# EAGLE board stepper-v1.1-pan (EAGLE 6.5.0)
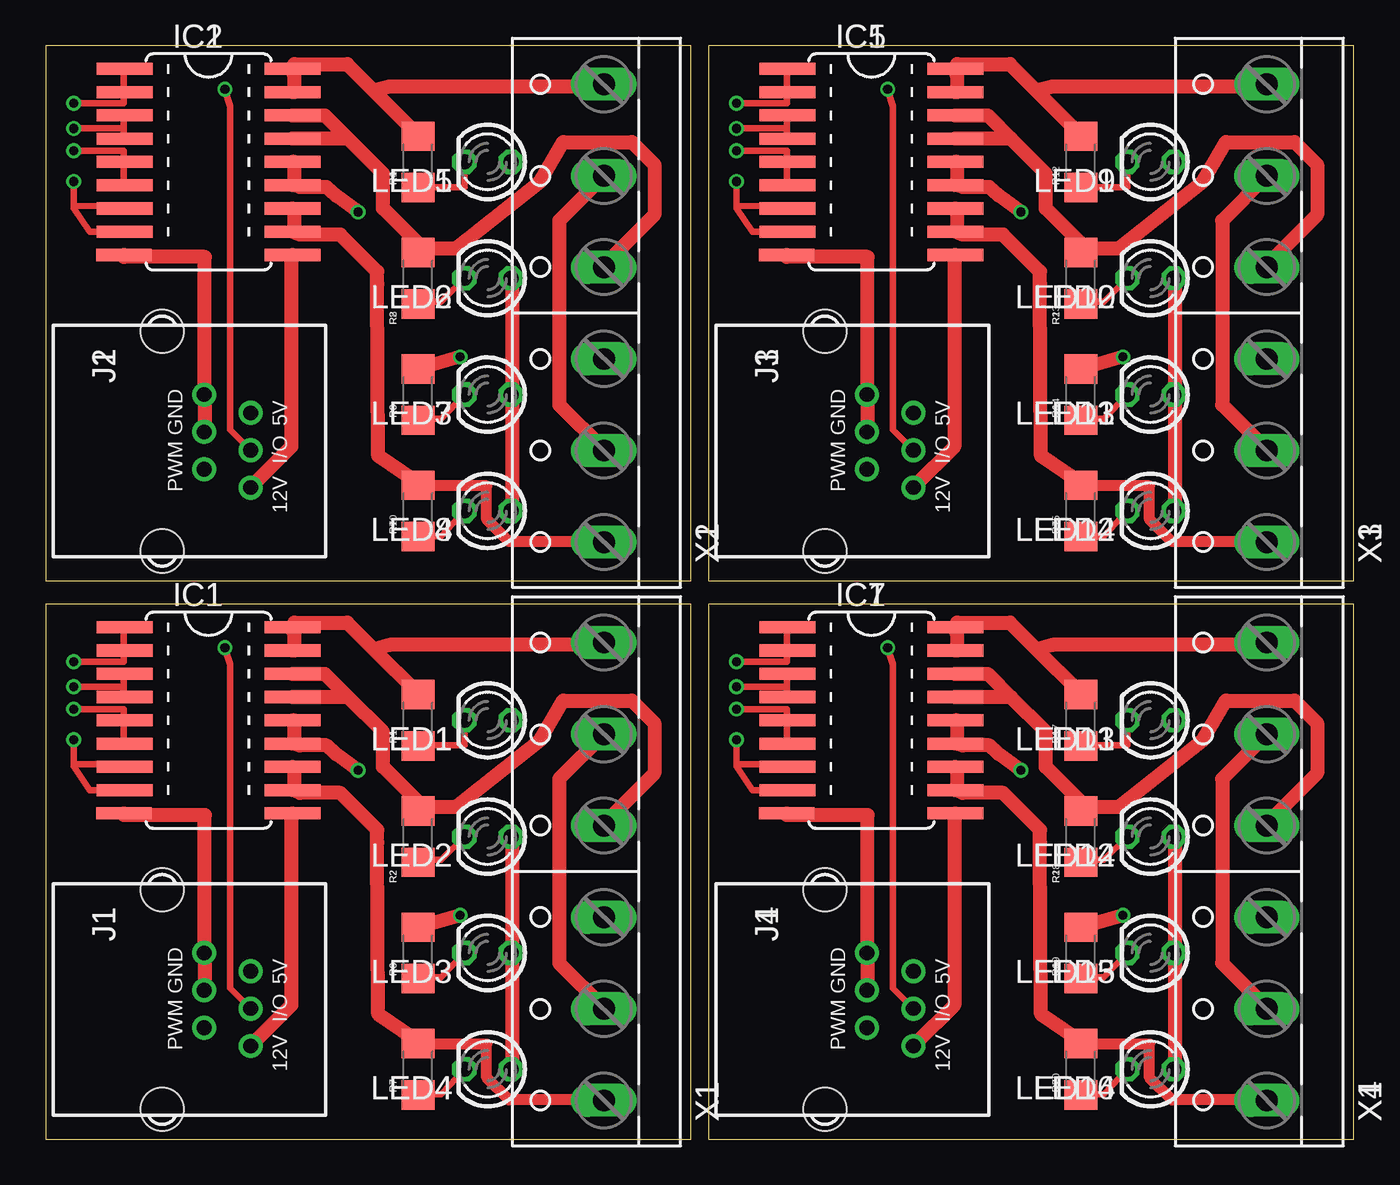
[diagram p0: board, top side]
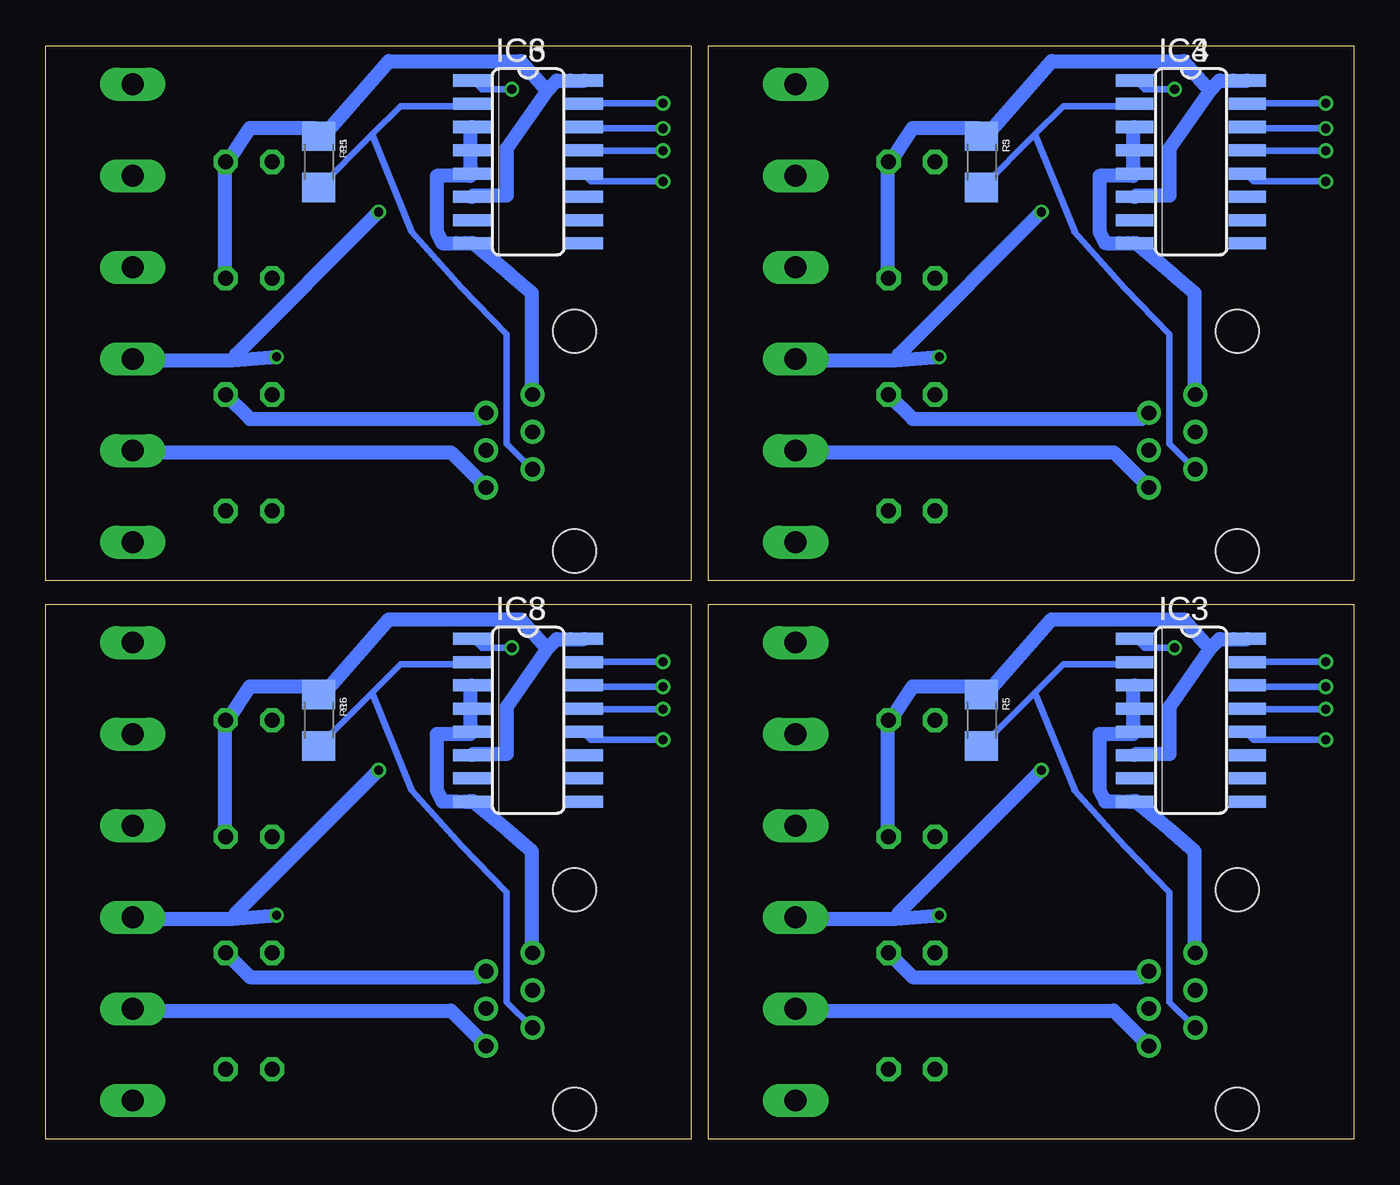
[diagram p1: board, bottom side, seen from below]

Size 71.42 x 59.68 mm. Coordinates in mm from the lower left corner, seen from the top.
Outline: 0,0 35.23,0 35.23,29.2 0,29.2 0,0
Outline: 0,30.48 35.23,30.48 35.23,59.68 0,59.68 0,30.48
Outline: 36.2,30.48 71.42,30.48 71.42,59.68 36.2,59.68 36.2,30.48
Outline: 36.2,0 71.42,0 71.42,29.2 36.2,29.2 36.2,0
Copper layers (1*16): Top 0.035mm / dielectric 1.5mm / Bottom 0.035mm
Design rules "Fusion_eagle_rule_v1.1": minimum track width 6mil, minimum drill 12mil, track to track 6mil, track to pad 6mil, pad to pad 6mil, via to via 6mil, smd to smd 0mil, copper to edge 10mil, drill to drill 10mil, minimum pad ring 10mil, minimum via ring 6mil, stop-mask expansion 2mil, vias tented up to drill 100mil, thermal gap 10mil
Net classes: 0 default: width 0.356 mm; 1 power: width 0.61 mm
vRestrict: area 1.9,15.2 to 8.3,29.2; area 9.5,15.2 to 15.9,29.2; area 1.9,45.7 to 8.3,59.7; area 9.5,45.7 to 15.9,59.7; area 38.1,45.7 to 44.5,59.7; area 45.7,45.7 to 52.1,59.7; area 38.1,15.2 to 44.5,29.2; area 45.7,15.2 to 52.1,29.2

## Footprints (pad centres in the part's own frame; a part is rotated, then mirrored left to right if it is on the bottom)
SO18W = smd 0.66 x 3.048: 1 -5.08,-4.585; 2 -3.81,-4.585; 3 -2.54,-4.585; 4 -1.27,-4.585; 5 0,-4.585; 6 1.27,-4.585; 7 2.54,-4.585; 8 3.81,-4.585; 9 5.08,-4.623; 10 5.08,4.585; 11 3.81,4.585; 12 2.54,4.585; 13 1.27,4.585; 14 0,4.585; 15 -1.27,4.585; 16 -2.54,4.585; 17 -3.81,4.585; 18 -5.08,4.585
SO16 = smd 0.66 x 2.032: 1 -4.445,-3.073; 2 -3.175,-3.073; 3 -1.905,-3.073; 4 -0.635,-3.073; 5 0.635,-3.073; 6 1.905,-3.073; 7 3.175,-3.073; 8 4.445,-3.073; 9 4.445,3.073; 10 3.175,3.073; 11 1.905,3.073; 12 0.635,3.073; 13 -0.635,3.073; 14 -1.905,3.073; 15 -3.175,3.073; 16 -4.445,3.073
RJ12-RIGHTANGLE = drill 0.8 pad 1.3: +5V -1.54,4.84; +12V 2.54,4.84; GND1 -2.54,2.3; GND2 -0.5,2.3; I/O 0.5,4.84; PWM 1.54,2.3 | hole 2.36: -6,0; 6,0
LED3MM = drill 0.813 octagon: A -1.27,0; K 1.27,0
1206 = smd 1.6 x 1.8: 1 -1.4,0; 2 1.4,0
W237-6 = drill 1.194 long: 1 -12.5,-1.27; 2 -7.5,-1.27; 3 -2.5,-1.27; 4 2.5,-1.27; 5 7.5,-1.27; 6 12.5,-1.27

## Placement (x,y rotation side)
IC1  ULN2803  [SO18W]  8.89,22.86 270 top
IC2  ULN2803  [SO18W]  8.89,53.34 270 top
IC3  CD74HC238M  [SO16]  8.89,22.86 270 bottom
IC4  CD74HC238M  [SO16]  8.89,53.34 270 bottom
IC5  ULN2803  [SO18W]  45.09,53.34 270 top
IC6  CD74HC238M  [SO16]  45.09,53.34 270 bottom
IC7  ULN2803  [SO18W]  45.09,22.86 270 top
IC8  CD74HC238M  [SO16]  45.09,22.86 270 bottom
J1  RJ12RIGHTANGLE  [RJ12-RIGHTANGLE]  6.35,7.62 270 top
J2  RJ12RIGHTANGLE  [RJ12-RIGHTANGLE]  6.35,38.1 270 top
J3  RJ12RIGHTANGLE  [RJ12-RIGHTANGLE]  42.55,38.1 270 top
J4  RJ12RIGHTANGLE  [RJ12-RIGHTANGLE]  42.55,7.62 270 top
LED1  LED3MM  [LED3MM]  24.13,22.86 180 top
LED2  LED3MM  [LED3MM]  24.13,16.51 180 top
LED3  LED3MM  [LED3MM]  24.13,10.16 180 top
LED4  LED3MM  [LED3MM]  24.13,3.81 180 top
LED5  LED3MM  [LED3MM]  24.13,53.34 180 top
LED6  LED3MM  [LED3MM]  24.13,46.99 180 top
LED7  LED3MM  [LED3MM]  24.13,40.64 180 top
LED8  LED3MM  [LED3MM]  24.13,34.29 180 top
LED9  LED3MM  [LED3MM]  60.33,53.34 180 top
LED10  LED3MM  [LED3MM]  60.33,46.99 180 top
LED11  LED3MM  [LED3MM]  60.33,40.64 180 top
LED12  LED3MM  [LED3MM]  60.33,34.29 180 top
LED13  LED3MM  [LED3MM]  60.33,22.86 180 top
LED14  LED3MM  [LED3MM]  60.33,16.51 180 top
LED15  LED3MM  [LED3MM]  60.33,10.16 180 top
LED16  LED3MM  [LED3MM]  60.33,3.81 180 top
R1  1k  [1206]  20.32,22.86 90 top
R2  1k  [1206]  20.32,16.51 90 top
R3  1k  [1206]  20.32,53.34 270 bottom
R4  1k  [1206]  20.32,53.34 90 top
R5  1k  [1206]  20.32,22.86 270 bottom
R6  1k  [1206]  20.32,10.16 90 top
R7  1k  [1206]  20.32,3.81 90 top
R8  1k  [1206]  20.32,46.99 90 top
R9  1k  [1206]  20.32,40.64 90 top
R10  1k  [1206]  20.32,34.29 90 top
R11  1k  [1206]  56.52,53.34 270 bottom
R12  1k  [1206]  56.52,53.34 90 top
R13  1k  [1206]  56.52,46.99 90 top
R14  1k  [1206]  56.52,40.64 90 top
R15  1k  [1206]  56.52,34.29 90 top
R16  1k  [1206]  56.52,22.86 270 bottom
R17  1k  [1206]  56.52,22.86 90 top
R18  1k  [1206]  56.52,16.51 90 top
R19  1k  [1206]  56.52,10.16 90 top
R20  1k  [1206]  56.52,3.81 90 top
X1  [W237-6]  29.21,14.61 90 top
X2  [W237-6]  29.21,45.09 90 top
X3  [W237-6]  65.41,45.09 90 top
X4  [W237-6]  65.41,14.61 90 top

## Library data of the parts
IC1-IC8 J1-J4 LED1-LED16 = lpatiny
R1-R20 = SparkFun
X1-X4 = con-wago-500; OC_FARNELL: unknown; OC_NEWARK: unknown

## Nets
+5V [power]: IC3.6 IC3.16 J1.+5V LED1.A LED2.A LED3.A LED4.A R5.1
+5V1 [power]: IC4.6 IC4.16 J2.+5V LED5.A LED6.A LED7.A LED8.A R3.1
+5V2 [power]: IC6.6 IC6.16 J3.+5V LED9.A LED10.A LED11.A LED12.A R11.1
+5V3 [power]: IC8.6 IC8.16 J4.+5V LED13.A LED14.A LED15.A LED16.A R16.1
+12V [power]: IC1.10 J1.+12V X1.2 X1.5
+12V1 [power]: IC2.10 J2.+12V X2.2 X2.5
+12V2 [power]: IC5.10 J3.+12V X3.2 X3.5
+12V3 [power]: IC7.10 J4.+12V X4.2 X4.5
GND [power]: IC1.9 IC3.3 IC3.4 IC3.5 IC3.8 J1.GND1 J1.GND2
GND1 [power]: IC2.9 IC4.3 IC4.4 IC4.5 IC4.8 J2.GND1 J2.GND2
GND2 [power]: IC5.9 IC6.3 IC6.4 IC6.5 IC6.8 J3.GND1 J3.GND2
GND3 [power]: IC7.9 IC8.3 IC8.4 IC8.5 IC8.8 J4.GND1 J4.GND2
N$1: IC1.1 IC1.2 IC3.15
N$2: IC3.2 J1.PWM R5.2
N$3 [power]: IC1.17 IC1.18 R1.2 X1.6
N$4 [power]: IC1.15 IC1.16 R2.2 X1.4
N$5 [power]: IC1.13 IC1.14 R6.2 X1.3
N$6 [power]: IC1.11 IC1.12 R7.2 X1.1
N$7: IC1.7 IC1.8 IC3.12
N$8: IC1.3 IC1.4 IC3.14
N$9: LED1.K R1.1
N$10: LED2.K R2.1
N$11: LED3.K R6.1
N$12: LED4.K R7.1
N$13: IC3.1 J1.I/O
N$14: IC1.5 IC1.6 IC3.13
N$15: IC2.1 IC2.2 IC4.15
N$16: IC4.2 J2.PWM R3.2
N$17 [power]: IC2.17 IC2.18 R4.2 X2.6
N$18 [power]: IC2.15 IC2.16 R8.2 X2.4
N$19 [power]: IC2.13 IC2.14 R9.2 X2.3
N$20 [power]: IC2.11 IC2.12 R10.2 X2.1
N$21: IC2.5 IC2.6 IC4.13
N$22: IC2.7 IC2.8 IC4.12
N$23: LED5.K R4.1
N$24: LED6.K R8.1
N$25: LED7.K R9.1
N$26: LED8.K R10.1
N$27: IC2.3 IC2.4 IC4.14
N$28: IC4.1 J2.I/O
N$29: IC5.1 IC5.2 IC6.15
N$30: IC6.2 J3.PWM R11.2
N$31 [power]: IC5.17 IC5.18 R12.2 X3.6
N$32 [power]: IC5.15 IC5.16 R13.2 X3.4
N$33 [power]: IC5.13 IC5.14 R14.2 X3.3
N$34 [power]: IC5.11 IC5.12 R15.2 X3.1
N$35: IC5.5 IC5.6 IC6.13
N$36: IC5.7 IC5.8 IC6.12
N$37: LED9.K R12.1
N$38: LED10.K R13.1
N$39: LED11.K R14.1
N$40: LED12.K R15.1
N$41: IC5.3 IC5.4 IC6.14
N$42: IC6.1 J3.I/O
N$43: IC7.1 IC7.2 IC8.15
N$44: IC8.2 J4.PWM R16.2
N$45 [power]: IC7.17 IC7.18 R17.2 X4.6
N$46 [power]: IC7.15 IC7.16 R18.2 X4.4
N$47 [power]: IC7.13 IC7.14 R19.2 X4.3
N$48 [power]: IC7.11 IC7.12 R20.2 X4.1
N$49: IC7.5 IC7.6 IC8.13
N$50: IC7.7 IC7.8 IC8.12
N$51: LED13.K R17.1
N$52: LED14.K R18.1
N$53: LED15.K R19.1
N$54: LED16.K R20.1
N$55: IC7.3 IC7.4 IC8.14
N$56: IC8.1 J4.I/O

## Tracks (layer width: path | path; a pad name or v marks a point on that pad's centre or on a via)
+5V
  Top 0.762: LED4.A 25.45,3.81 25.45,10.06 LED3.A 25.45,10.52 25.45,16.46 LED2.A
  Bottom 0.762: LED3.A 24.08,8.84 11.58,8.84 11.28,9.14 J1.+5V | 7.86,26.76 10.05,23.62 10.05,21.03 11.89,21.03 IC3.6 | 7.86,26.76 7.33,27.29 6.57,27.29 5.94,27.28 IC3.16 | LED2.A 25.45,16.61 25.45,22.55 LED1.A 25.3,22.86 24.08,24.71 20.57,24.71 20.42,24.23 R5.1 19.96,24.38 16.49,28.36 9.3,28.36 7.86,26.76
+5V1
  Top 0.762: LED8.A 25.45,34.29 25.45,40.54 LED7.A 25.45,41 25.45,46.94 LED6.A
  Bottom 0.762: LED7.A 24.08,39.32 11.58,39.32 11.28,39.62 J2.+5V | 7.86,57.24 10.05,54.1 10.05,51.51 11.89,51.51 IC4.6 | 7.86,57.24 7.33,57.77 6.57,57.77 5.94,57.76 IC4.16 | LED6.A 25.45,47.09 25.45,53.03 LED5.A 25.3,53.34 24.08,55.19 20.57,55.19 20.42,54.71 R3.1 19.96,54.86 16.49,58.84 9.3,58.84 7.86,57.24
+5V2
  Top 0.762: LED12.A 61.65,34.29 61.65,40.54 LED11.A 61.65,41 61.65,46.94 LED10.A
  Bottom 0.762: LED11.A 60.27,39.32 47.78,39.32 47.47,39.62 J3.+5V | 44.06,57.24 46.24,54.1 46.24,51.51 48.08,51.51 IC6.6 | 44.06,57.24 43.52,57.77 42.76,57.77 42.14,57.76 IC6.16 | LED10.A 61.65,47.09 61.65,53.03 LED9.A 61.49,53.34 60.27,55.19 56.77,55.19 56.62,54.71 R11.1 56.16,54.86 52.69,58.84 45.49,58.84 44.06,57.24
+5V3
  Top 0.762: LED16.A 61.65,3.81 61.65,10.06 LED15.A 61.65,10.52 61.65,16.46 LED14.A
  Bottom 0.762: LED15.A 60.27,8.84 47.78,8.84 47.47,9.14 J4.+5V | 44.06,26.76 46.24,23.62 46.24,21.03 48.08,21.03 IC8.6 | 44.06,26.76 43.52,27.29 42.76,27.29 42.14,27.28 IC8.16 | LED14.A 61.65,16.61 61.65,22.55 LED13.A 61.49,22.86 60.27,24.71 56.77,24.71 56.62,24.23 R16.1 56.16,24.38 52.69,28.36 45.49,28.36 44.06,26.76
+12V
  Top 0.762: J1.+12V 11.28,5.18 13.41,7.32 13.41,17.68 IC1.10 | X1.2 30.48,7.16 28.04,9.6 28.04,19.66 30.48,22.1 X1.5
  Bottom 0.762: J1.+12V 11.28,5.18 13.11,7.01 30.48,7.01 X1.2
+12V1
  Top 0.762: J2.+12V 11.28,35.66 13.41,37.8 13.41,48.16 IC2.10 | X2.2 30.48,37.64 28.04,40.08 28.04,50.14 30.48,52.58 X2.5
  Bottom 0.762: J2.+12V 11.28,35.66 13.11,37.49 30.48,37.49 X2.2
+12V2
  Top 0.762: J3.+12V 47.47,35.66 49.61,37.8 49.61,48.16 IC5.10 | X3.2 66.67,37.64 64.24,40.08 64.24,50.14 66.67,52.58 X3.5
  Bottom 0.762: J3.+12V 47.47,35.66 49.3,37.49 66.67,37.49 X3.2
+12V3
  Top 0.762: J4.+12V 47.47,5.18 49.61,7.32 49.61,17.68 IC7.10 | X4.2 66.67,7.16 64.24,9.6 64.24,19.66 66.67,22.1 X4.5
  Bottom 0.762: J4.+12V 47.47,5.18 49.3,7.01 66.67,7.01 X4.2
GND
  Top 0.762: J1.GND2 8.69,8.23 8.69,10.06 J1.GND1 8.69,10.52 8.69,17.68 4.27,17.68 IC1.9
  Bottom 0.762: 12.04,18.44 IC3.8 | IC3.8 12.34,18.42 12.81,18.43 13.58,18.43 13.88,19.05 13.88,22.1 12.04,22.1 IC3.5 12.04,22.55 12.04,23.47 IC3.4 12.04,23.77 12.04,24.69 IC3.3 | IC3.8 11.92,18.44 9.91,16.76 9.92,16.76 8.69,15.7 8.69,10.21 J1.GND1
GND1
  Top 0.762: J2.GND2 8.69,38.71 8.69,40.54 J2.GND1 8.69,41 8.69,48.16 4.27,48.16 IC2.9
  Bottom 0.762: 12.04,48.92 IC4.8 | IC4.8 12.34,48.9 12.81,48.91 13.58,48.91 13.88,49.53 13.88,52.58 12.04,52.58 IC4.5 12.04,53.03 12.04,53.95 IC4.4 12.04,54.25 12.04,55.17 IC4.3 | IC4.8 11.92,48.92 9.91,47.24 9.92,47.24 8.69,46.18 8.69,40.69 J2.GND1
GND2
  Top 0.762: J3.GND2 44.88,38.71 44.88,40.54 J3.GND1 44.88,41 44.88,48.16 40.46,48.16 IC5.9
  Bottom 0.762: 48.23,48.92 IC6.8 | IC6.8 48.54,48.9 49.01,48.91 49.77,48.91 50.08,49.53 50.08,52.58 48.23,52.58 IC6.5 48.23,53.03 48.23,53.95 IC6.4 48.23,54.25 48.23,55.17 IC6.3 | IC6.8 48.12,48.92 46.1,47.24 46.12,47.24 44.88,46.18 44.88,40.69 J3.GND1
GND3
  Top 0.762: J4.GND2 44.88,8.23 44.88,10.06 J4.GND1 44.88,10.52 44.88,17.68 40.46,17.68 IC7.9
  Bottom 0.762: 48.23,18.44 IC8.8 | IC8.8 48.54,18.42 49.01,18.43 49.77,18.43 50.08,19.05 50.08,22.1 48.23,22.1 IC8.5 48.23,22.55 48.23,23.47 IC8.4 48.23,23.77 48.23,24.69 IC8.3 | IC8.8 48.12,18.44 46.1,16.76 46.12,16.76 44.88,15.7 44.88,10.21 J4.GND1
N$1  (via drill 0.5)
  Top 0.356: v1.52,26.06 4.27,26.06 4.27,26.67 IC1.2 4.27,26.82 4.27,27.89 IC1.1
  Bottom 0.356: v1.52,26.06 5.79,26.06 IC3.15
N$2
  Bottom 0.356: 17.4,24.36 15.85,25.91 12.04,25.91 IC3.2 | 17.4,24.36 20.27,21.49 R5.2 | 17.4,24.36 15.24,19.05 15.27,19.05 12.54,16 10.06,13.46 10.06,7.47 8.69,6.1 J1.PWM
N$3
  Top 0.762: 17.91,26.75 16.46,28.19 13.56,28.19 13.56,28.04 IC1.18 13.56,27.58 13.56,26.67 IC1.17 | 17.91,26.75 20.27,24.38 R1.2 | 17.91,26.75 18.77,26.98 30.48,26.98 X1.6
N$4
  Top 0.762: X1.4 30.48,17.22 33.24,19.98 33.24,22.71 32,23.94 28.26,23.94 26.99,21.77 22.4,18.14 20.57,18.14 R2.2 20.32,18.41 18.41,20.32 18.41,22.23 16.51,24.13 | 16.51,24.13 IC1.15 | IC1.16 15.24,25.4 16.51,24.13
N$5  (via drill 0.5)
  Top 0.762: IC1.14 13.56,22.86 13.56,21.64 IC1.13 13.87,21.49 15.33,21.49 15.84,21.03 v17.06,20.13 | v22.63,12.22 20.42,11.58 R6.2
  Bottom 0.762: 24.99,12.04 v22.63,12.22 | 24.99,12.04 30.48,12.04 X1.3 | v17.06,20.13 24.84,12.34 24.99,12.04
N$6
  Top 0.61: 20.42,5.18 24.08,5.18 24.08,3.35 25.3,2.13 30.48,2.13
  Top 0.762: IC1.12 13.56,20.27 13.56,19.05 IC1.11 13.87,18.9 16.08,18.9 18.1,16.88 18.1,16.19 18.15,6.82 20.12,5.49 R7.2 20.42,5.18 | 30.48,2.13 X1.1
N$7  (via drill 0.5)
  Top 0.356: IC1.8 2.4,19.05 1.53,20.34 | 1.53,20.34 v1.52,21.79 | IC1.7 4.27,20.27 3.17,20.45 1.52,20.46 1.53,20.34
  Bottom 0.356: v1.52,21.79 5.49,21.79 5.79,22.1 IC3.12
N$8  (via drill 0.5)
  Top 0.356: 4.27,24.69 v1.52,24.69 | 4.27,24.69 4.27,24.23 IC1.4 | 4.27,24.69 4.27,25.3 IC1.3
  Bottom 0.356: v1.52,24.69 5.79,24.69 IC3.14
N$9
  Top 0.356: LED1.K 22.86,21.49 20.42,21.49 R1.1
N$10
  Top 0.356: LED2.K 21.59,15.24 20.42,15.24 R2.1
N$11
  Top 0.356: LED3.K 21.59,8.84 20.42,8.84 R6.1
N$12
  Top 0.356: LED4.K 21.59,2.44 20.42,2.44 R7.1
N$13  (via drill 0.5)
  Top 0.356: v9.78,26.82 10.06,25.91 10.06,8.23 11.12,7.16 J1.I/O
  Bottom 0.356: v9.78,26.82 11.43,26.82 11.89,27.28 IC3.1
N$14  (via drill 0.5)
  Top 0.356: v1.52,23.47 4.27,23.47 4.27,22.86 IC1.5 4.27,22.71 4.27,21.64 IC1.6
  Bottom 0.356: v1.52,23.47 5.79,23.47 IC3.13
N$15  (via drill 0.5)
  Top 0.356: v1.52,56.54 4.27,56.54 4.27,57.15 IC2.2 4.27,57.3 4.27,58.37 IC2.1
  Bottom 0.356: v1.52,56.54 5.79,56.54 IC4.15
N$16
  Bottom 0.356: 17.4,54.84 15.85,56.39 12.04,56.39 IC4.2 | 17.4,54.84 20.27,51.97 R3.2 | 17.4,54.84 15.24,49.53 15.27,49.53 12.54,46.48 10.06,43.94 10.06,37.95 8.69,36.58 J2.PWM
N$17
  Top 0.762: 17.91,57.23 16.46,58.67 13.56,58.67 13.56,58.52 IC2.18 13.56,58.06 13.56,57.15 IC2.17 | 17.91,57.23 20.27,54.86 R4.2 | 17.91,57.23 18.77,57.45 30.48,57.45 X2.6
N$18
  Top 0.762: X2.4 30.48,47.7 33.24,50.46 33.24,53.19 32,54.42 28.26,54.42 26.99,52.25 22.4,48.62 20.57,48.62 R8.2 20.32,48.9 18.41,50.8 18.41,52.7 16.51,54.61 | 16.51,54.61 IC2.15 | IC2.16 15.24,55.88 16.51,54.61
N$19  (via drill 0.5)
  Top 0.762: IC2.14 13.56,53.34 13.56,52.12 IC2.13 13.87,51.97 15.33,51.97 15.84,51.51 v17.06,50.61 | v22.63,42.7 20.42,42.06 R9.2
  Bottom 0.762: 24.99,42.52 v22.63,42.7 | 24.99,42.52 30.48,42.52 X2.3 | v17.06,50.61 24.84,42.82 24.99,42.52
N$20
  Top 0.61: 20.42,35.66 24.08,35.66 24.08,33.83 25.3,32.61 30.48,32.61
  Top 0.762: IC2.12 13.56,50.75 13.56,49.53 IC2.11 13.87,49.38 16.08,49.38 18.1,47.36 18.1,46.67 18.15,37.3 20.12,35.97 R10.2 20.42,35.66 | 30.48,32.61 X2.1
N$21  (via drill 0.5)
  Top 0.356: v1.52,53.95 4.27,53.95 4.27,53.34 IC2.5 4.27,53.19 4.27,52.12 IC2.6
  Bottom 0.356: v1.52,53.95 5.79,53.95 IC4.13
N$22  (via drill 0.5)
  Top 0.356: IC2.8 2.4,49.53 1.53,50.83 | 1.53,50.83 v1.52,52.27 | IC2.7 4.27,50.75 3.17,50.93 1.52,50.94 1.53,50.83
  Bottom 0.356: v1.52,52.27 5.49,52.27 5.79,52.58 IC4.12
N$23
  Top 0.356: LED5.K 22.86,51.97 20.42,51.97 R4.1
N$24
  Top 0.356: LED6.K 21.59,45.72 20.42,45.72 R8.1
N$25
  Top 0.356: LED7.K 21.59,39.32 20.42,39.32 R9.1
N$26
  Top 0.356: LED8.K 21.59,32.92 20.42,32.92 R10.1
N$27  (via drill 0.5)
  Top 0.356: 4.27,55.17 v1.52,55.17 | 4.27,55.17 4.27,54.71 IC2.4 | 4.27,55.17 4.27,55.78 IC2.3
  Bottom 0.356: v1.52,55.17 5.79,55.17 IC4.14
N$28  (via drill 0.5)
  Top 0.356: v9.78,57.3 10.06,56.39 10.06,38.71 11.12,37.64 J2.I/O
  Bottom 0.356: v9.78,57.3 11.43,57.3 11.89,57.76 IC4.1
N$29  (via drill 0.5)
  Top 0.356: v37.72,56.54 40.46,56.54 40.46,57.15 IC5.2 40.46,57.3 40.46,58.37 IC5.1
  Bottom 0.356: v37.72,56.54 41.99,56.54 IC6.15
N$30
  Bottom 0.356: 53.59,54.84 52.05,56.39 48.23,56.39 IC6.2 | 53.59,54.84 56.46,51.97 R11.2 | 53.59,54.84 51.44,49.53 51.46,49.53 48.73,46.48 46.25,43.94 46.25,37.95 44.88,36.58 J3.PWM
N$31
  Top 0.762: 54.1,57.23 52.65,58.67 49.76,58.67 49.76,58.52 IC5.18 49.76,58.06 49.76,57.15 IC5.17 | 54.1,57.23 56.46,54.86 R12.2 | 54.1,57.23 54.97,57.45 66.67,57.45 X3.6
N$32
  Top 0.762: X3.4 66.67,47.7 69.43,50.46 69.43,53.19 68.2,54.42 64.45,54.42 63.18,52.25 58.6,48.62 56.77,48.62 R13.2 56.52,48.9 54.61,50.8 54.61,52.7 52.7,54.61 | 52.7,54.61 IC5.15 | IC5.16 51.44,55.88 52.7,54.61
N$33  (via drill 0.5)
  Top 0.762: IC5.14 49.76,53.34 49.76,52.12 IC5.13 50.06,51.97 51.52,51.97 52.03,51.51 v53.25,50.61 | v58.83,42.7 56.62,42.06 R14.2
  Bottom 0.762: 61.19,42.52 v58.83,42.7 | 61.19,42.52 66.67,42.52 X3.3 | v53.25,50.61 61.04,42.82 61.19,42.52
N$34
  Top 0.61: 56.62,35.66 60.27,35.66 60.27,33.83 61.49,32.61 66.67,32.61
  Top 0.762: IC5.12 49.76,50.75 49.76,49.53 IC5.11 50.06,49.38 52.27,49.38 54.29,47.36 54.29,46.67 54.35,37.3 56.31,35.97 R15.2 56.62,35.66 | 66.67,32.61 X3.1
N$35  (via drill 0.5)
  Top 0.356: v37.72,53.95 40.46,53.95 40.46,53.34 IC5.5 40.46,53.19 40.46,52.12 IC5.6
  Bottom 0.356: v37.72,53.95 41.99,53.95 IC6.13
N$36  (via drill 0.5)
  Top 0.356: IC5.8 38.6,49.53 37.73,50.83 | 37.73,50.83 v37.72,52.27 | IC5.7 40.46,50.75 39.37,50.93 37.72,50.94 37.73,50.83
  Bottom 0.356: v37.72,52.27 41.68,52.27 41.99,52.58 IC6.12
N$37
  Top 0.356: LED9.K 59.05,51.97 56.62,51.97 R12.1
N$38
  Top 0.356: LED10.K 57.78,45.72 56.62,45.72 R13.1
N$39
  Top 0.356: LED11.K 57.78,39.32 56.62,39.32 R14.1
N$40
  Top 0.356: LED12.K 57.78,32.92 56.62,32.92 R15.1
N$41  (via drill 0.5)
  Top 0.356: 40.46,55.17 v37.72,55.17 | 40.46,55.17 40.46,54.71 IC5.4 | 40.46,55.17 40.46,55.78 IC5.3
  Bottom 0.356: v37.72,55.17 41.99,55.17 IC6.14
N$42  (via drill 0.5)
  Top 0.356: v45.97,57.3 46.25,56.39 46.25,38.71 47.32,37.64 J3.I/O
  Bottom 0.356: v45.97,57.3 47.62,57.3 48.08,57.76 IC6.1
N$43  (via drill 0.5)
  Top 0.356: v37.72,26.06 40.46,26.06 40.46,26.67 IC7.2 40.46,26.82 40.46,27.89 IC7.1
  Bottom 0.356: v37.72,26.06 41.99,26.06 IC8.15
N$44
  Bottom 0.356: 53.59,24.36 52.05,25.91 48.23,25.91 IC8.2 | 53.59,24.36 56.46,21.49 R16.2 | 53.59,24.36 51.44,19.05 51.46,19.05 48.73,16 46.25,13.46 46.25,7.47 44.88,6.1 J4.PWM
N$45
  Top 0.762: 54.1,26.75 52.65,28.19 49.76,28.19 49.76,28.04 IC7.18 49.76,27.58 49.76,26.67 IC7.17 | 54.1,26.75 56.46,24.38 R17.2 | 54.1,26.75 54.97,26.98 66.67,26.98 X4.6
N$46
  Top 0.762: X4.4 66.67,17.22 69.43,19.98 69.43,22.71 68.2,23.94 64.45,23.94 63.18,21.77 58.6,18.14 56.77,18.14 R18.2 56.52,18.41 54.61,20.32 54.61,22.23 52.7,24.13 | 52.7,24.13 IC7.15 | IC7.16 51.44,25.4 52.7,24.13
N$47  (via drill 0.5)
  Top 0.762: IC7.14 49.76,22.86 49.76,21.64 IC7.13 50.06,21.49 51.52,21.49 52.03,21.03 v53.25,20.13 | v58.83,12.22 56.62,11.58 R19.2
  Bottom 0.762: 61.19,12.04 v58.83,12.22 | 61.19,12.04 66.67,12.04 X4.3 | v53.25,20.13 61.04,12.34 61.19,12.04
N$48
  Top 0.61: 56.62,5.18 60.27,5.18 60.27,3.35 61.49,2.13 66.67,2.13
  Top 0.762: IC7.12 49.76,20.27 49.76,19.05 IC7.11 50.06,18.9 52.27,18.9 54.29,16.88 54.29,16.19 54.35,6.82 56.31,5.49 R20.2 56.62,5.18 | 66.67,2.13 X4.1
N$49  (via drill 0.5)
  Top 0.356: v37.72,23.47 40.46,23.47 40.46,22.86 IC7.5 40.46,22.71 40.46,21.64 IC7.6
  Bottom 0.356: v37.72,23.47 41.99,23.47 IC8.13
N$50  (via drill 0.5)
  Top 0.356: IC7.8 38.6,19.05 37.73,20.34 | 37.73,20.34 v37.72,21.79 | IC7.7 40.46,20.27 39.37,20.45 37.72,20.46 37.73,20.34
  Bottom 0.356: v37.72,21.79 41.68,21.79 41.99,22.1 IC8.12
N$51
  Top 0.356: LED13.K 59.05,21.49 56.62,21.49 R17.1
N$52
  Top 0.356: LED14.K 57.78,15.24 56.62,15.24 R18.1
N$53
  Top 0.356: LED15.K 57.78,8.84 56.62,8.84 R19.1
N$54
  Top 0.356: LED16.K 57.78,2.44 56.62,2.44 R20.1
N$55  (via drill 0.5)
  Top 0.356: 40.46,24.69 v37.72,24.69 | 40.46,24.69 40.46,24.23 IC7.4 | 40.46,24.69 40.46,25.3 IC7.3
  Bottom 0.356: v37.72,24.69 41.99,24.69 IC8.14
N$56  (via drill 0.5)
  Top 0.356: v45.97,26.82 46.25,25.91 46.25,8.23 47.32,7.16 J4.I/O
  Bottom 0.356: v45.97,26.82 47.62,26.82 48.08,27.28 IC8.1

## Text on the board
tDocu: Stepper 1.1 - 12V | Stepper 1.1 - 12V | Stepper 1.1 - 12V | Stepper 1.1 - 12V
_tNames: IC1 | IC1 | LED1 | LED1 | R1 | R1 | LED2 | LED2 | R2 | R2 | J1 | J1 | LED3 | LED3 | R6 | R6 | LED4 | LED4 | R7 | R7 | X1 | X1 | IC1 | IC1 | R1 | LED1 | R1 | LED1 | LED2 | LED2 | R2 | R2 | J1 | J1 | LED3 | LED3 | R6 | R6 | R7 | LED4 | R7 | LED4 | X1 | X1
_bNames: IC3 | IC3 | R5 | R5 | IC3 | IC3 | R5 | R5